# EAGLE board Parallel CS Prototype not linked to schematic (EAGLE 7.2.0)
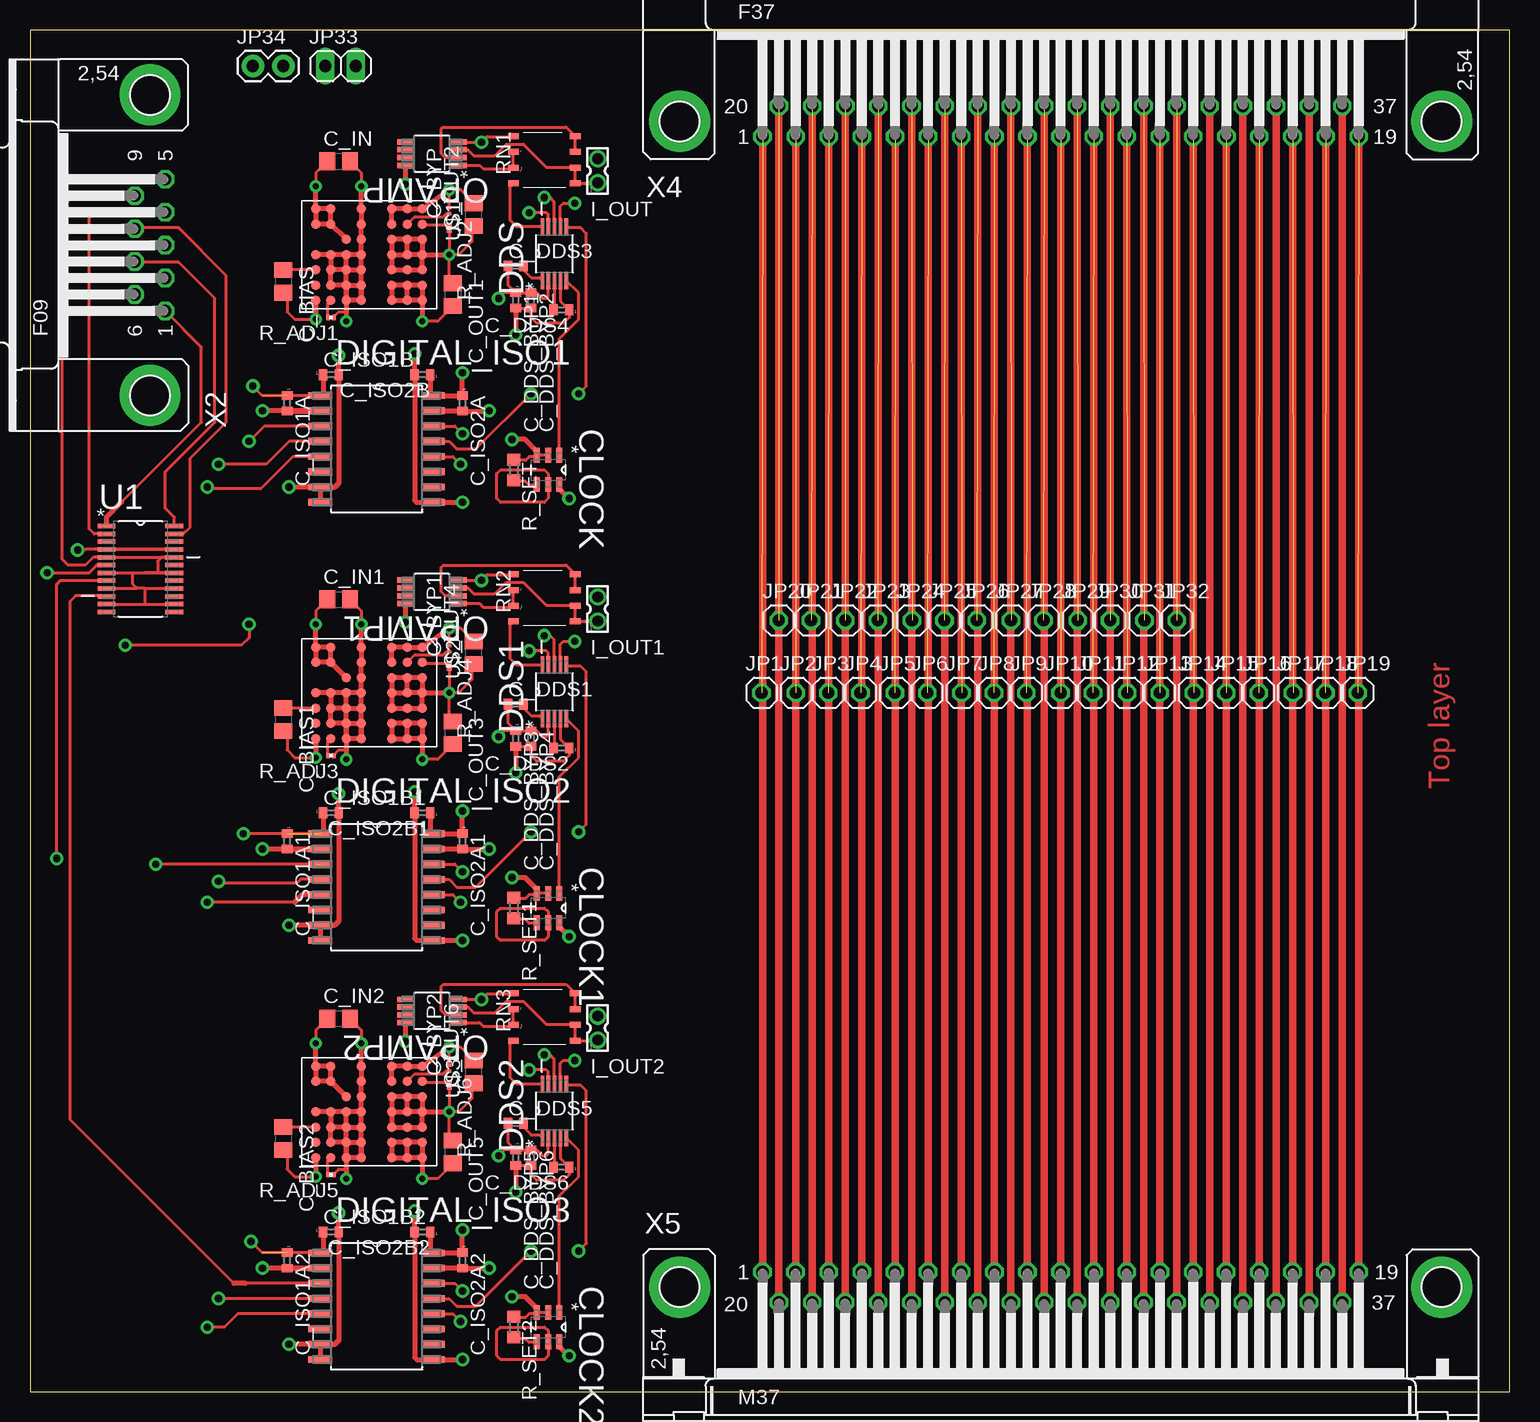
[diagram p0: board, top side]
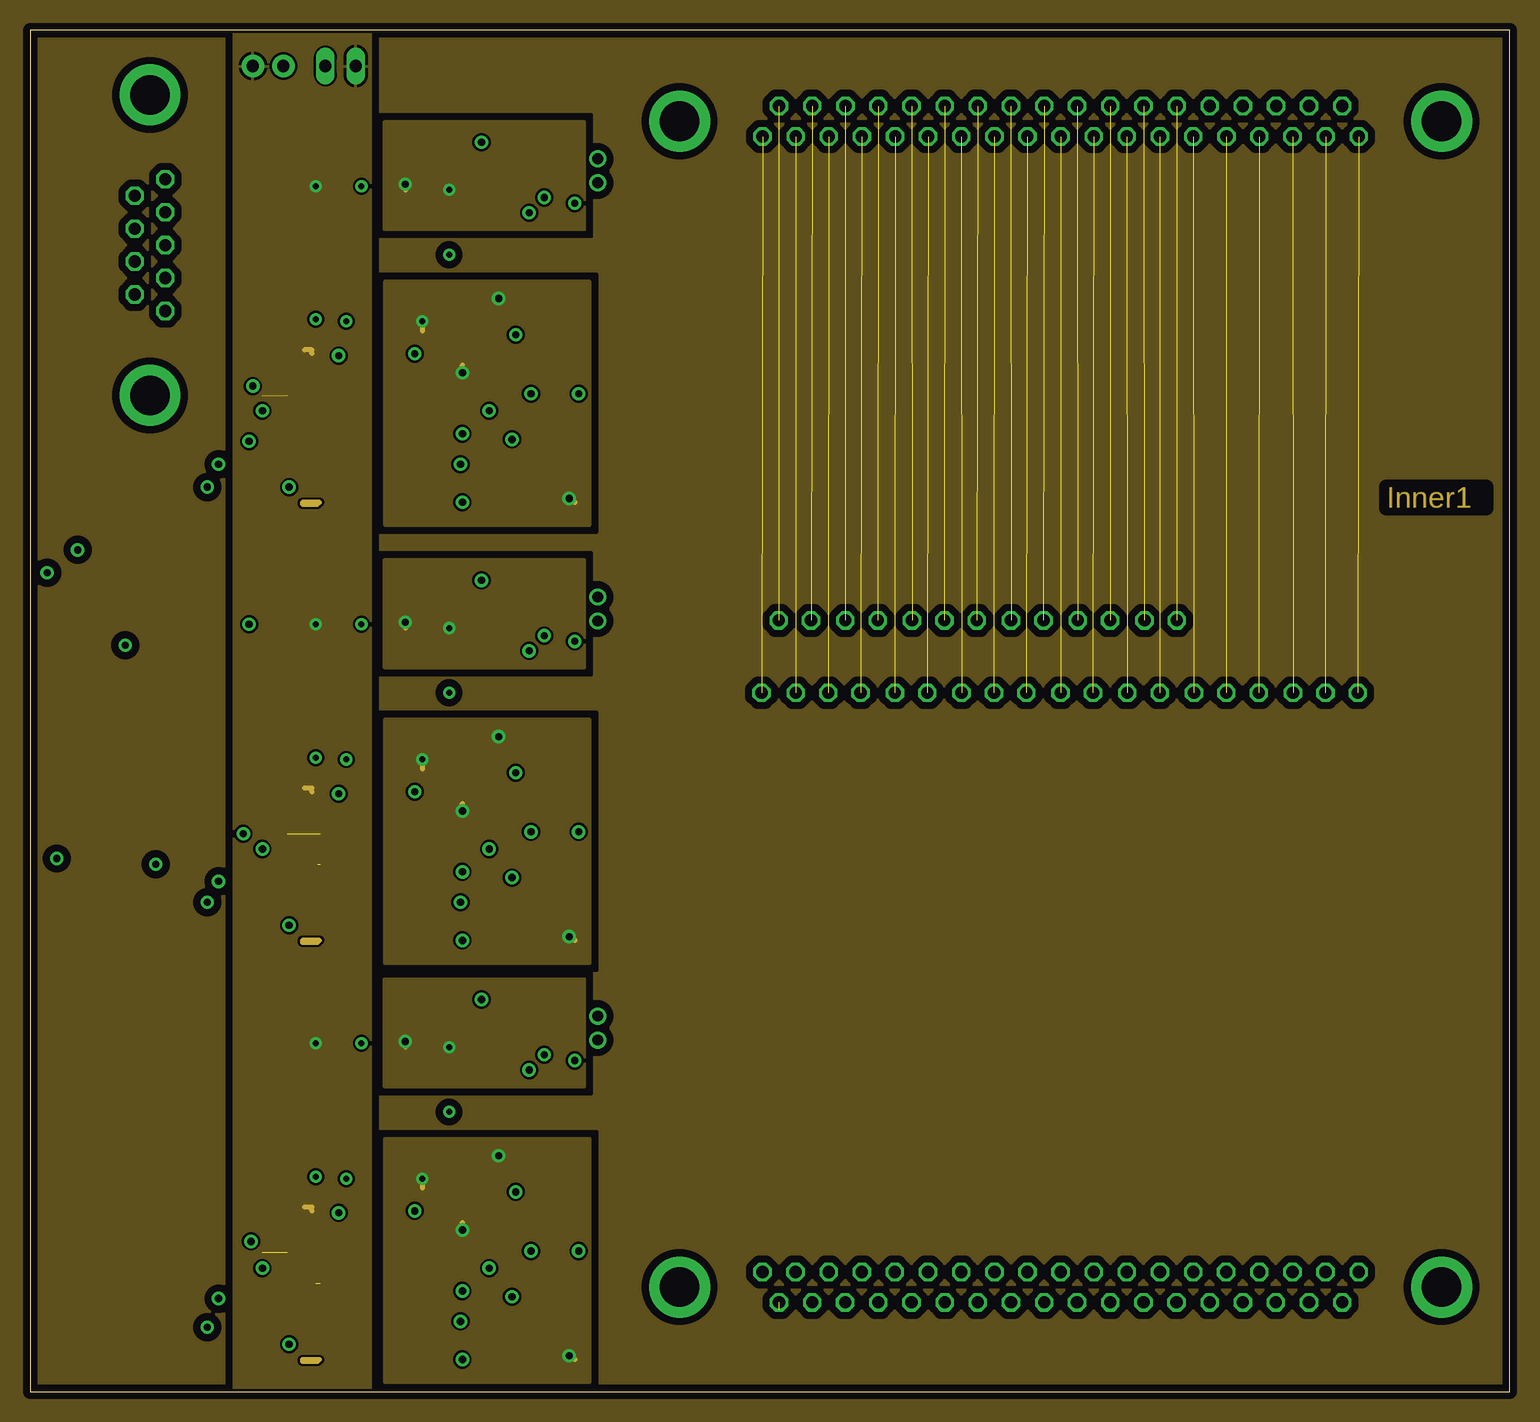
[diagram p1: board, inner layer VDD]
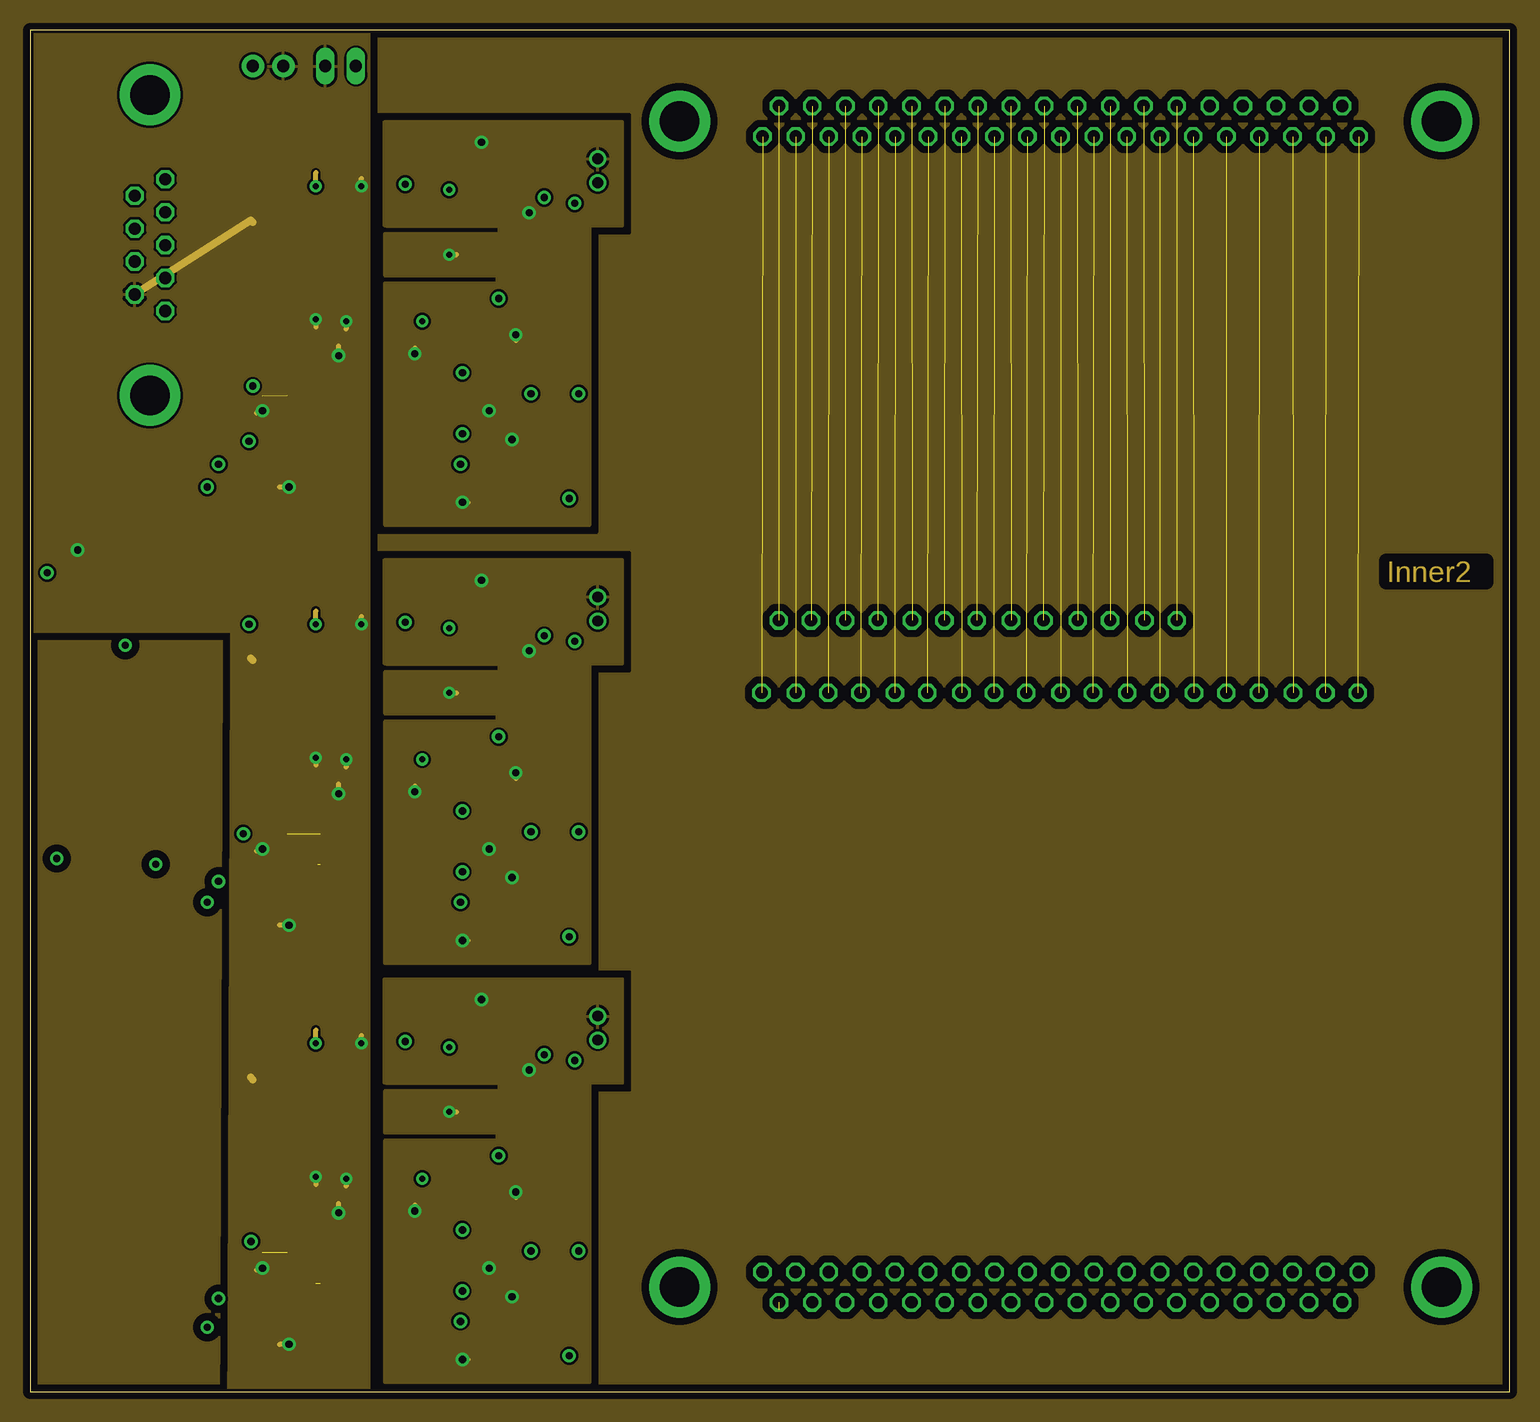
[diagram p2: board, inner layer GND]
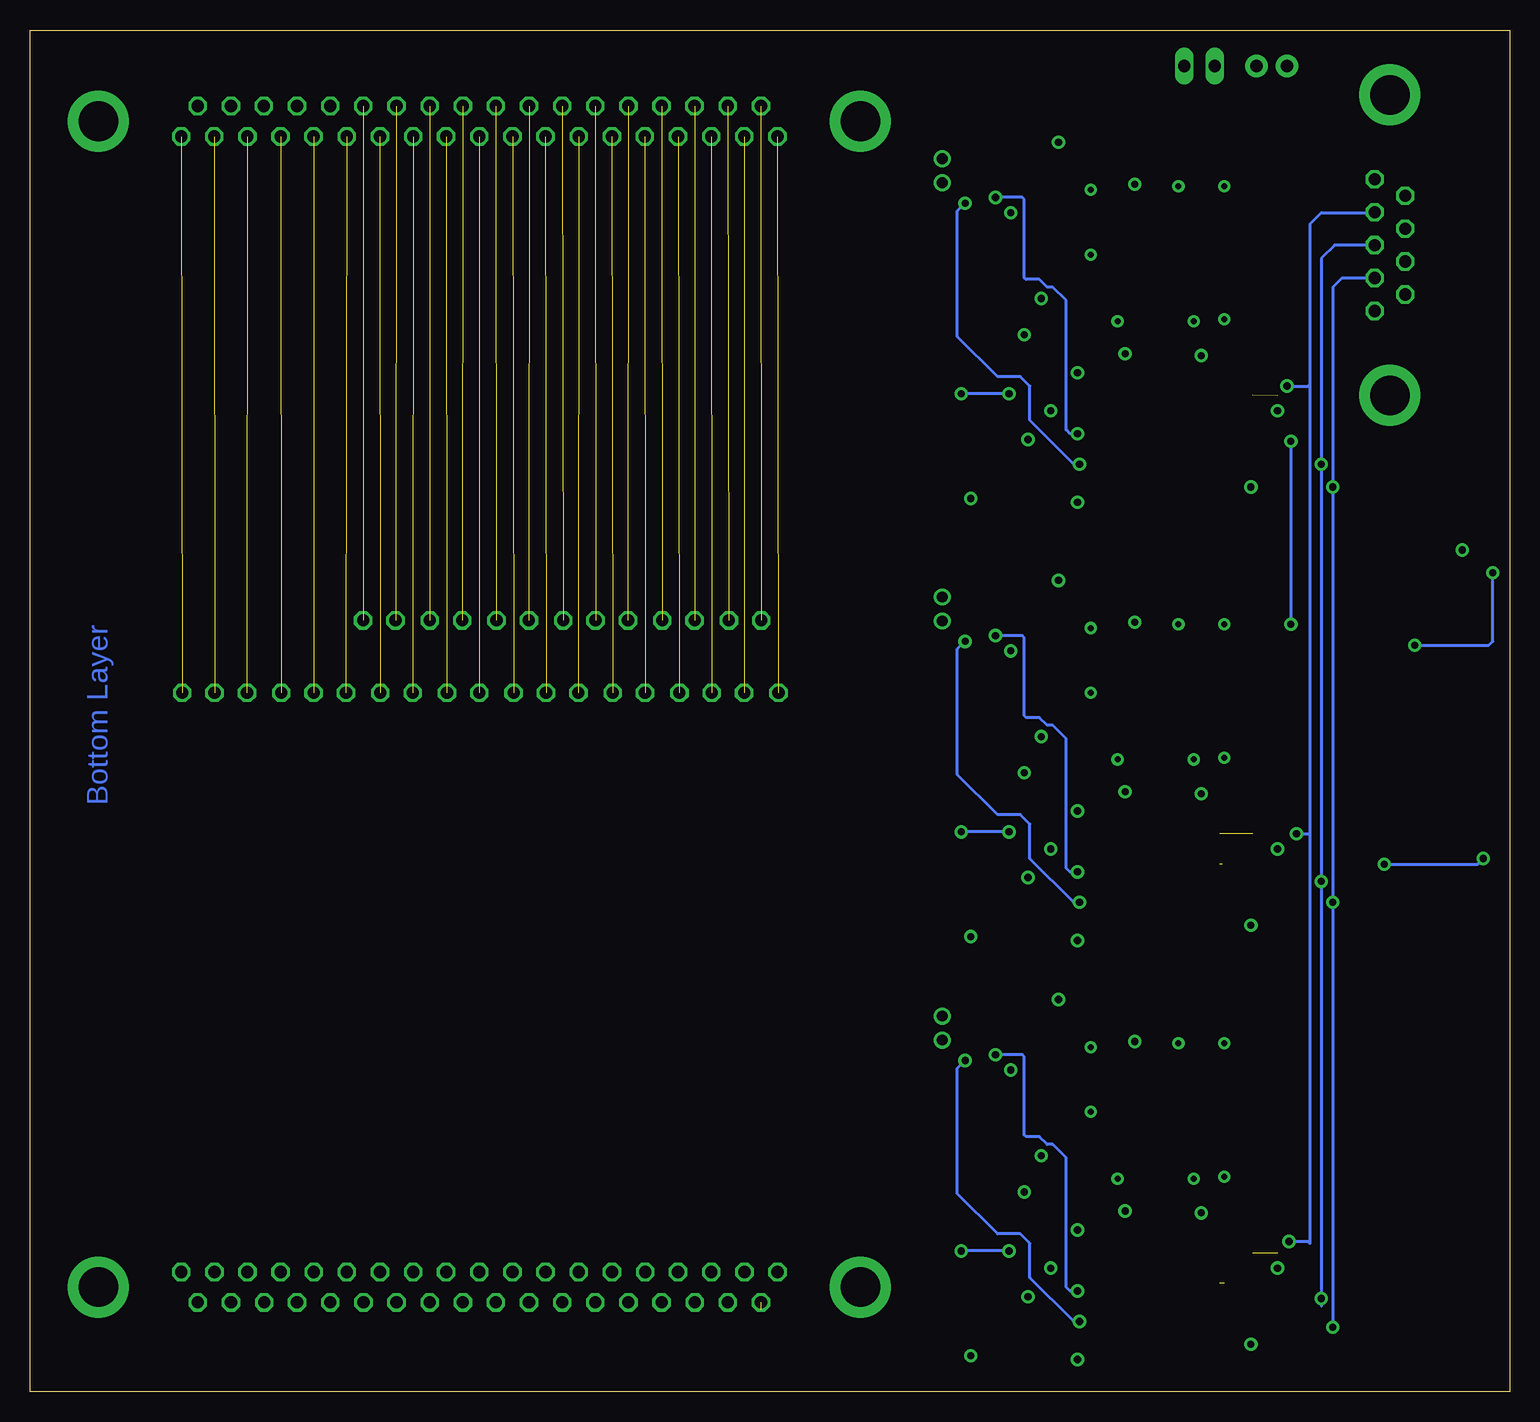
[diagram p3: board, bottom side, seen from below]

Size 123.33 x 113.49 mm. Coordinates in mm from the lower left corner, seen from the top.
Outline: 0,0 123.33,0 123.33,113.49 0,113.49 0,0
Copper layers (1*2*15*16): Top 0.035mm / dielectric 1.5mm / VDD 0.035mm / dielectric 0.15mm / GND 0.035mm / dielectric 0.2mm / Bottom 0.035mm
Design rules "pcbtrain *": minimum track width 0.2mm, minimum drill 0.4mm, track to track 0.2mm, track to pad 0.2mm, pad to pad 0.2mm, via to via 0.2mm, smd to smd 0mil, copper to edge 10mil, drill to drill 0.2mm, minimum pad ring 10mil, minimum via ring 10mil, stop-mask expansion 0.125mm, vias tented up to drill 0mil, thermal gap 10mil

## Footprints (pad centres in the part's own frame; a part is rotated, then mirrored left to right if it is on the bottom)
C0805 = smd 1.3 x 1.5: 1 -0.95,0; 2 0.95,0
C0201 = smd 0.25 x 0.35: 1 -0.25,0; 2 0.25,0
C0402 = smd 0.7 x 0.9: 1 -0.65,0; 2 0.65,0
SOT95P280X100-6N = smd 1.219 x 0.508: 1 -1.219,0.94; 2 -1.219,0; 3 -1.219,-0.94; 4 1.219,-0.94; 5 1.219,0; 6 1.219,0.94
SOP50P490X110-10N = smd 1.422 x 0.305: 1 -2.235,0.991; 2 -2.235,0.508; 3 -2.235,0; 4 -2.235,-0.508; 5 -2.235,-0.991; 6 2.235,-0.991; 7 2.235,-0.508; 8 2.235,0; 9 2.235,0.508; 10 2.235,0.991
SOIC127P1032X265-16N = smd 1.981 x 0.559: 1 -4.699,4.445; 2 -4.699,3.175; 3 -4.699,1.905; 4 -4.699,0.635; 5 -4.699,-0.635; 6 -4.699,-1.905; 7 -4.699,-3.175; 8 -4.699,-4.445; 9 4.699,-4.445; 10 4.699,-3.175; 11 4.699,-1.905; 12 4.699,-0.635; 13 4.699,0.635; 14 4.699,1.905; 15 4.699,3.175; 16 4.699,4.445
332-02 = drill 0.9 pad 1.27: 1 0,-1; 2 0,1
1X01 = drill 1.016 octagon: 1 0,0
1X02 = drill 1.016 long: 1 -1.27,0; 2 1.27,0
1X02' = drill 1.016 pad 1.88: 1 0,0; 2 2.54,0
SOP65P490X109-8N = smd 1.372 x 0.457: 1 -2.21,0.965; 2 -2.21,0.33; 3 -2.21,-0.33; 4 -2.21,-0.965; 5 2.21,-0.965; 6 2.21,-0.33; 7 2.21,0.33; 8 2.21,0.965
R0201 = smd 0.28 x 0.43: 1 -0.255,0; 2 0.255,0
R0603 = smd 1 x 1.1: 1 -0.85,0; 2 0.85,0
CTS742C083 = smd 0.5 x 0.9: 1 -2.47,-3.848; 2 -1.162,-3.848; 3 0.146,-3.848; 4 1.454,-3.848; 5 1.454,1.308; 6 0.146,1.308; 7 -1.162,1.308; 8 -2.47,1.308
SOP65P640X120-24N = smd 1.473 x 0.356: 1 -2.819,3.581; 2 -2.819,2.921; 3 -2.819,2.286; 4 -2.819,1.626; 5 -2.819,0.965; 6 -2.819,0.33; 7 -2.819,-0.33; 8 -2.819,-0.965; 9 -2.819,-1.626; 10 -2.819,-2.286; 11 -2.819,-2.921; 12 -2.819,-3.581; 13 2.819,-3.581; 14 2.819,-2.921; 15 2.819,-2.286; 16 2.819,-1.626; 17 2.819,-0.965; 18 2.819,-0.33; 19 2.819,0.33; 20 2.819,0.965; 21 2.819,1.626; 22 2.819,2.286; 23 2.819,2.921; 24 2.819,3.581
BGA-49 = smd 0.78 x 0.78: ADJ1 3.81,-3.175; ADJ2 -2.54,4.445; BIAS 1.27,-4.445; BYP -2.54,3.175; GND@1 -3.81,-0.635; GND@2 -2.54,-0.635; GND@3 -1.27,-0.635; GND@4 0,-0.635; GND@5 1.27,-0.635; GND@6 2.54,-0.635; GND@7 3.81,-0.635; GND@8 0,-1.905; GND@9 1.27,-1.905; GND@10 2.54,-1.905; GND@11 3.81,-1.905; GND@12 0,-3.175; GND@13 1.27,-3.175; GND@14 2.54,-3.175; GND@15 0,-4.445; GND@16 3.81,-4.445; RUN -1.27,-1.905; SS 2.54,-4.445; VIN@1 -3.81,-3.175; VIN@2 -2.54,-3.175; VIN@3 -3.81,-4.445; VIN@4 -2.54,-4.445; VOUT1@1 2.54,4.445; VOUT1@2 2.54,3.175; VOUT1@3 2.54,1.905; VOUT1@4 3.81,4.445; VOUT1@5 3.81,3.175; VOUT1@6 3.81,1.905; VOUT2@1 -3.81,4.445; VOUT2@2 -3.81,3.175; VOUT2@3 -3.81,1.905; VOUT2@4 -2.54,1.905; VOUT-@1 -1.27,4.445; VOUT-@2 -1.27,3.175; VOUT-@3 -1.27,1.905; VOUT-@4 0,4.445; VOUT-@5 0,3.175; VOUT-@6 0,1.905; VOUT-@7 1.27,4.445; VOUT-@8 1.27,3.175; VOUT-@9 1.27,1.905
F09HP = drill 1.016 octagon: 1 -5.486,-1.27; 2 -2.743,-1.27; 3 0,-1.27; 4 2.743,-1.27; 5 5.486,-1.27; 6 -4.115,1.27; 7 -1.372,1.27; 8 1.372,1.27; 9 4.115,1.27 | drill 3.302 pad 5.08: G1 -12.522,0; G2 12.522,0
F37HP = drill 1.016 octagon: 1 -24.841,-1.27; 2 -22.073,-1.27; 3 -19.329,-1.27; 4 -16.561,-1.27; 5 -13.792,-1.27; 6 -11.049,-1.27; 7 -8.28,-1.27; 8 -5.512,-1.27; 9 -2.769,-1.27; 10 0,-1.27; 11 2.769,-1.27; 12 5.512,-1.27; 13 8.28,-1.27; 14 11.049,-1.27; 15 13.818,-1.27; 16 16.561,-1.27; 17 19.329,-1.27; 18 22.098,-1.27; 19 24.841,-1.27; 20 -23.47,1.27; 21 -20.701,1.27; 22 -17.932,1.27; 23 -15.189,1.27; 24 -12.421,1.27; 25 -9.652,1.27; 26 -6.909,1.27; 27 -4.14,1.27; 28 -1.372,1.27; 29 1.372,1.27; 30 4.14,1.27; 31 6.909,1.27; 32 9.677,1.27; 33 12.421,1.27; 34 15.189,1.27; 35 17.958,1.27; 36 20.701,1.27; 37 23.47,1.27 | drill 3.302 pad 5.08: G1 -31.75,0; G2 31.75,0
M37HP = drill 1.016 octagon: 1 -24.841,1.27; 2 -22.098,1.27; 3 -19.329,1.27; 4 -16.561,1.27; 5 -13.818,1.27; 6 -11.049,1.27; 7 -8.28,1.27; 8 -5.512,1.27; 9 -2.769,1.27; 10 0,1.27; 11 2.769,1.27; 12 5.512,1.27; 13 8.28,1.27; 14 11.049,1.27; 15 13.792,1.27; 16 16.561,1.27; 17 19.329,1.27; 18 22.073,1.27; 19 24.841,1.27; 20 -23.47,-1.27; 21 -20.701,-1.27; 22 -17.958,-1.27; 23 -15.189,-1.27; 24 -12.421,-1.27; 25 -9.652,-1.27; 26 -6.909,-1.27; 27 -4.14,-1.27; 28 -1.372,-1.27; 29 1.372,-1.27; 30 4.14,-1.27; 31 6.909,-1.27; 32 9.652,-1.27; 33 12.421,-1.27; 34 15.189,-1.27; 35 17.932,-1.27; 36 20.701,-1.27; 37 23.47,-1.27 | drill 3.302 pad 5.08: G1 -31.75,0; G2 31.75,0

## Placement (x,y rotation side)
C_BIAS  4.7u  [C0805]  21.11,92.55 270 top
C_BIAS1  4.7u  [C0805]  21.11,56.04 270 top
C_BIAS2  4.7u  [C0805]  21.11,21.11 270 top
C_BYP  0.01u  [C0201]  34.92,98.42 90 top
C_BYP1  0.01u  [C0201]  34.92,61.91 90 top
C_BYP2  0.01u  [C0201]  34.92,26.99 90 top
C_DDS1  10n  [C0402]  40.48,57.31 0 top
C_DDS2  100n  [C0402]  44.29,53.66 180 top
C_DDS3  10n  [C0402]  40.48,93.82 0 top
C_DDS4  100n  [C0402]  44.29,90.17 180 top
C_DDS5  10n  [C0402]  40.48,22.38 0 top
C_DDS6  100n  [C0402]  44.29,18.73 180 top
C_DDS_BYP1  0.1u  [C0402]  40.48,90.96 270 top
C_DDS_BYP2  10u  [C0402]  41.75,90.96 270 top
C_DDS_BYP3  0.1u  [C0402]  40.48,54.45 270 top
C_DDS_BYP4  10u  [C0402]  41.75,54.45 270 top
C_DDS_BYP5  0.1u  [C0402]  40.48,19.53 270 top
C_DDS_BYP6  10u  [C0402]  41.75,19.53 270 top
C_IN  2.2u  [C0805]  25.72,102.55 0 top
C_IN1  2.2u  [C0805]  25.72,66.04 0 top
C_IN2  2.2u  [C0805]  25.72,31.11 0 top
C_ISO1A  1u  [C0402]  21.43,82.39 270 top
C_ISO1A1  1u  [C0402]  21.43,45.88 270 top
C_ISO1A2  1u  [C0402]  21.43,10.95 270 top
C_ISO1B  0.1u  [C0402]  25.08,84.77 0 top
C_ISO1B1  0.1u  [C0402]  25.08,48.26 0 top
C_ISO1B2  0.1u  [C0402]  25.08,13.34 0 top
C_ISO2A  1u  [C0402]  36.04,82.39 270 top
C_ISO2A1  1u  [C0402]  36.04,45.88 270 top
C_ISO2A2  1u  [C0402]  36.04,10.95 270 top
C_ISO2B  0.1u  [C0402]  32.7,84.77 180 top
C_ISO2B1  0.1u  [C0402]  32.7,48.26 180 top
C_ISO2B2  0.1u  [C0402]  32.7,13.34 180 top
C_OUT1  47u  [C0805]  35.24,91.44 270 top
C_OUT2  10u  [C0805]  36.99,98.11 90 top
C_OUT3  47u  [C0805]  35.24,54.93 270 top
C_OUT4  10u  [C0805]  36.99,61.59 90 top
C_OUT5  47u  [C0805]  35.24,20 270 top
C_OUT6  10u  [C0805]  36.99,26.67 90 top
CLOCK  LTC6906IS6PBF  [SOT95P280X100-6N]  43.18,76.83 270 top
CLOCK1  LTC6906IS6PBF  [SOT95P280X100-6N]  43.18,40.32 270 top
CLOCK2  LTC6906IS6PBF  [SOT95P280X100-6N]  43.18,5.4 270 top
DDS  AD9833BRMZ  [SOP50P490X110-10N]  43.7,94.85 90 top
DDS1  AD9833BRMZ  [SOP50P490X110-10N]  43.7,58.34 90 top
DDS2  AD9833BRMZ  [SOP50P490X110-10N]  43.7,23.42 90 top
DIGITAL_ISO1  ADUM1410ARWZ  [SOIC127P1032X265-16N]  28.89,78.58 0 top
DIGITAL_ISO2  ADUM1410ARWZ  [SOIC127P1032X265-16N]  28.89,42.07 0 top
DIGITAL_ISO3  ADUM1410ARWZ  [SOIC127P1032X265-16N]  28.89,7.14 0 top
I_OUT  332-02  [332-02]  47.31,101.76 0 top
I_OUT1  332-02  [332-02]  47.31,65.25 0 top
I_OUT2  332-02  [332-02]  47.31,30.32 0 top
JP1  [1X01]  60.96,58.26 0 top
JP2  [1X01]  63.82,58.26 0 top
JP3  [1X01]  66.52,58.26 0 top
JP4  [1X01]  69.22,58.26 0 top
JP5  [1X01]  72.07,58.26 0 top
JP6  [1X01]  74.77,58.26 0 top
JP7  [1X01]  77.63,58.26 0 top
JP8  [1X01]  80.33,58.26 0 top
JP9  [1X01]  83.03,58.26 0 top
JP10  [1X01]  85.88,58.26 0 top
JP11  [1X01]  88.58,58.26 0 top
JP12  [1X01]  91.44,58.26 0 top
JP13  [1X01]  94.14,58.26 0 top
JP14  [1X01]  97,58.26 0 top
JP15  [1X01]  99.69,58.26 0 top
JP16  [1X01]  102.39,58.26 0 top
JP17  [1X01]  105.25,58.26 0 top
JP18  [1X01]  107.95,58.26 0 top
JP19  [1X01]  110.65,58.26 0 top
JP20  [1X01]  62.39,64.29 0 top
JP21  [1X01]  65.09,64.29 0 top
JP22  [1X01]  67.94,64.29 0 top
JP23  [1X01]  70.64,64.29 0 top
JP24  [1X01]  73.5,64.29 0 top
JP25  [1X01]  76.2,64.29 0 top
JP26  [1X01]  78.9,64.29 0 top
JP27  [1X01]  81.76,64.29 0 top
JP28  [1X01]  84.45,64.29 0 top
JP29  [1X01]  87.31,64.29 0 top
JP30  [1X01]  90.01,64.29 0 top
JP31  [1X01]  92.87,64.29 0 top
JP32  [1X01]  95.57,64.29 0 top
JP33  PWR  [1X02]  25.88,110.49 0 top
JP34  [1X02']  18.57,110.49 0 top
OPAMP  LMC6482IMM  [SOP65P490X109-8N]  33.5,103.19 180 top
OPAMP1  LMC6482IMM  [SOP65P490X109-8N]  33.5,66.67 180 top
OPAMP2  LMC6482IMM  [SOP65P490X109-8N]  33.5,31.75 180 top
R_ADJ1  6.8k  [R0201]  25.08,89.53 180 top
R_ADJ2  300k  [R0201]  34.92,97 270 top
R_ADJ3  6.8k  [R0201]  25.08,53.02 180 top
R_ADJ4  300k  [R0201]  34.92,60.48 270 top
R_ADJ5  6.8k  [R0201]  25.08,18.1 180 top
R_ADJ6  300k  [R0201]  34.92,25.56 270 top
R_SET  200k  [R0603]  40.32,76.83 270 top
R_SET1  200k  [R0603]  40.32,40.32 270 top
R_SET2  200k  [R0603]  40.32,5.4 270 top
RN1  CTS742C083  [CTS742C083]  41.59,103.19 90 top
RN2  CTS742C083  [CTS742C083]  41.59,66.67 90 top
RN3  CTS742C083  [CTS742C083]  41.59,31.75 90 top
U1  ADG714BRUZ  [SOP65P640X120-24N]  9.21,68.58 0 top
U$1  LTM8048  [BGA-49]  28.26,94.77 270 top
U$2  LTM8048  [BGA-49]  28.26,58.26 270 top
U$3  LTM8048  [BGA-49]  28.26,23.34 270 top
X2  CTR_ARD  [F09HP]  10,95.57 90 top
X4  DSUB _T  [F37HP]  85.88,105.89 0 top
X5  DSUB_B  [M37HP]  85.88,8.73 0 top

## Library data of the parts
C_BIAS C_BIAS1 C_BIAS2 C_BYP C_BYP1 C_BYP2 C_DDS1-C_DDS6 C_DDS_BYP1-C_DDS_BYP6 C_IN C_IN1 C_IN2 C_ISO1A C_ISO1A1 C_ISO1A2 C_ISO1B C_ISO1B1 C_ISO1B2 C_ISO2A C_ISO2A1 C_ISO2A2 C_ISO2B C_ISO2B1 C_ISO2B2 C_OUT1-C_OUT6 R_ADJ1-R_ADJ6 R_SET R_SET1 R_SET2 = resistor
CLOCK CLOCK1 CLOCK2 = LTC6906; MPN: LTC6906IS6#PBF; OC_FARNELL: 1432109; OC_NEWARK: 10R6975; PACKAGE: TSOT-23-6; SUPPLIER: Linear Technology
DDS DDS1 DDS2 = ad9833; MPN: AD9833BRMZ; OC_FARNELL: 1581966; OC_NEWARK: 19M1014; PACKAGE: MSOP-10; SUPPLIER: Analog Devices
DIGITAL_ISO1-DIGITAL_ISO3 = SwitchBoard; MPN: ADUM1410ARWZ; OC_FARNELL: 2067770; OC_NEWARK: 73T8174; PACKAGE: 16-Lead SOIC_W; SUPPLIER: Analog Devices
I_OUT I_OUT1 I_OUT2 = con-garry
JP1-JP32 JP34 = SwitchBoard
JP33 = pinhead
OPAMP OPAMP1 OPAMP2 = LMC6482; MPN: LMC6482IMM; OC_FARNELL: 1468890; OC_NEWARK: 83F3826; PACKAGE: MSOP-8; SUPPLIER: NationalSemiconductor
RN1-RN3 = resistor-net; OC_FARNELL: unknown; OC_NEWARK: unknown
U1 = SwitchBoard; MPN: ADG714BRUZ; OC_FARNELL: 9604367; OC_NEWARK: 59K1531; PACKAGE: TSSOP-24; SUPPLIER: Analog Devices
U$1-U$3 = LTM8048
X2 X4 X5 = con-subd; OC_FARNELL: unknown; OC_NEWARK: unknown

## Nets
ARD_5V: C_ISO1A1.1 C_ISO1A2.1 C_ISO1A.1 C_ISO1B1.1 C_ISO1B2.1 C_ISO1B.1 DIGITAL_ISO1.1 DIGITAL_ISO2.1 DIGITAL_ISO3.1 U1.2 X2.4
CLK_OUT: CLOCK.1 DDS.5
CLK_OUT1: CLOCK1.1 DDS1.5
CLK_OUT2: CLOCK2.1 DDS2.5
COMP: C_DDS3.2 DDS.1
COMP1: C_DDS1.2 DDS1.1
COMP2: C_DDS5.2 DDS2.1
FSYNC: DDS.8 DIGITAL_ISO1.14
FSYNC1: DDS1.8 DIGITAL_ISO2.14
FSYNC2: DDS2.8 DIGITAL_ISO3.14
FSYNC_ARD: U1.5 U1.7 U1.9 U1.11 U1.14 U1.16 U1.18 U1.20 X2.9
FSYNC_IN: DIGITAL_ISO1.3 U1.6
FSYNC_IN1: DIGITAL_ISO2.3
FSYNC_IN2: DIGITAL_ISO3.3
GND: C_BIAS1.2 C_BIAS2.2 C_BIAS.2 C_IN1.2 C_IN2.2 C_IN.2 C_ISO1A1.2 C_ISO1A2.2 C_ISO1A.2 C_ISO1B1.2 C_ISO1B2.2 C_ISO1B.2 DIGITAL_ISO1.2 DIGITAL_ISO1.7 DIGITAL_ISO1.8 DIGITAL_ISO2.2 DIGITAL_ISO2.7 DIGITAL_ISO2.8 DIGITAL_ISO3.2 DIGITAL_ISO3.7 DIGITAL_ISO3.8 JP33.1 JP34.2 R_ADJ1.1 R_ADJ3.1 R_ADJ5.1 U1.4 U1.21 U$1.GND@1 U$1.GND@2 U$1.GND@3 U$1.GND@4 U$1.GND@5 U$1.GND@6 U$1.GND@7 U$1.GND@8 U$1.GND@9 U$1.GND@10 U$1.GND@11 U$1.GND@12 U$1.GND@13 U$1.GND@14 U$1.GND@15 U$1.GND@16 U$2.GND@1 U$2.GND@2 U$2.GND@3 U$2.GND@4 U$2.GND@5 U$2.GND@6 U$2.GND@7 U$2.GND@8 U$2.GND@9 U$2.GND@10 U$2.GND@11 U$2.GND@12 U$2.GND@13 U$2.GND@14 U$2.GND@15 U$2.GND@16 U$3.GND@1 U$3.GND@2 U$3.GND@3 U$3.GND@4 U$3.GND@5 U$3.GND@6 U$3.GND@7 U$3.GND@8 U$3.GND@9 U$3.GND@10 U$3.GND@11 U$3.GND@12 U$3.GND@13 U$3.GND@14 U$3.GND@15 U$3.GND@16 X2.6
GND_CS: C_DDS4.1 C_DDS_BYP1.2 C_DDS_BYP2.2 C_ISO2A.2 C_ISO2B.2 C_OUT1.1 C_OUT2.1 CLOCK.2 CLOCK.3 DDS.4 DDS.9 DIGITAL_ISO1.9 DIGITAL_ISO1.15 I_OUT.2 OPAMP.4 R_ADJ2.2 R_SET.1 RN1.5 U$1.VOUT-@1 U$1.VOUT-@2 U$1.VOUT-@3 U$1.VOUT-@4 U$1.VOUT-@5 U$1.VOUT-@6 U$1.VOUT-@7 U$1.VOUT-@8 U$1.VOUT-@9
GND_CS1: C_DDS2.1 C_DDS_BYP3.2 C_DDS_BYP4.2 C_ISO2A1.2 C_ISO2B1.2 C_OUT3.1 C_OUT4.1 CLOCK1.2 CLOCK1.3 DDS1.4 DDS1.9 DIGITAL_ISO2.9 DIGITAL_ISO2.15 I_OUT1.2 OPAMP1.4 R_ADJ4.2 R_SET1.1 RN2.5 U$2.VOUT-@1 U$2.VOUT-@2 U$2.VOUT-@3 U$2.VOUT-@4 U$2.VOUT-@5 U$2.VOUT-@6 U$2.VOUT-@7 U$2.VOUT-@8 U$2.VOUT-@9
GND_CS2: C_DDS6.1 C_DDS_BYP5.2 C_DDS_BYP6.2 C_ISO2A2.2 C_ISO2B2.2 C_OUT5.1 C_OUT6.1 CLOCK2.2 CLOCK2.3 DDS2.4 DDS2.9 DIGITAL_ISO3.9 DIGITAL_ISO3.15 I_OUT2.2 OPAMP2.4 R_ADJ6.2 R_SET2.1 RN3.5 U$3.VOUT-@1 U$3.VOUT-@2 U$3.VOUT-@3 U$3.VOUT-@4 U$3.VOUT-@5 U$3.VOUT-@6 U$3.VOUT-@7 U$3.VOUT-@8 U$3.VOUT-@9
IOUT: I_OUT.1 OPAMP.3 RN1.1 RN1.2
IOUT1: I_OUT1.1 OPAMP1.3 RN2.1 RN2.2
IOUT2: I_OUT2.1 OPAMP2.3 RN3.1 RN3.2
N$1: C_DDS4.2 DDS.3
N$2: C_BYP.1 U$1.BYP
N$3: OPAMP.2 RN1.3 RN1.4
N$6: C_BIAS1.1 U$2.BIAS
N$7: OPAMP.1 RN1.6 RN1.7
N$8: CLOCK.4 R_SET.2
N$9: R_ADJ3.2 U$2.ADJ1
N$10: C_BIAS.1 U$1.BIAS
N$11: R_ADJ1.2 U$1.ADJ1
N$12: R_ADJ4.1 U$2.ADJ2
N$13: R_ADJ2.1 U$1.ADJ2
N$14: C_BYP1.1 U$2.BYP
N$15: C_DDS2.2 DDS1.3
N$16: OPAMP1.2 RN2.3 RN2.4
N$17: OPAMP1.1 RN2.6 RN2.7
N$18: CLOCK1.4 R_SET1.2
N$21: C_BIAS2.1 U$3.BIAS
N$22: R_ADJ5.2 U$3.ADJ1
N$23: R_ADJ6.1 U$3.ADJ2
N$24: C_BYP2.1 U$3.BYP
N$25: C_DDS6.2 DDS2.3
N$26: OPAMP2.2 RN3.3 RN3.4
N$27: OPAMP2.1 RN3.6 RN3.7
N$28: CLOCK2.4 R_SET2.2
OUT_1: JP1.1 X4.1 X5.1
OUT_2: JP2.1 X4.2 X5.2
OUT_3: JP3.1 X4.3 X5.3
OUT_4: JP4.1 X4.4 X5.4
OUT_5: JP5.1 X4.5 X5.5
OUT_6: JP6.1 X4.6 X5.6
OUT_7: JP7.1 X4.7 X5.7
OUT_8: JP8.1 X4.8 X5.8
OUT_9: JP9.1 X4.9 X5.9
OUT_10: JP10.1 X4.10 X5.10
OUT_11: JP11.1 X4.11 X5.11
OUT_12: JP12.1 X4.12 X5.12
OUT_13: JP13.1 X4.13 X5.13
OUT_14: JP14.1 X4.14 X5.14
OUT_15: JP15.1 X4.15 X5.15
OUT_16: JP16.1 X4.16 X5.16
OUT_17: JP17.1 X4.17 X5.17
OUT_18: JP18.1 X4.18 X5.18
OUT_19: JP19.1 X4.19 X5.19
OUT_20: JP20.1 X4.20 X5.20
OUT_21: JP21.1 X4.21 X5.21
OUT_22: JP22.1 X4.22 X5.22
OUT_23: JP23.1 X4.23 X5.23
OUT_24: JP24.1 X4.24 X5.24
OUT_25: JP25.1 X4.25 X5.25
OUT_26: JP26.1 X4.26 X5.26
OUT_27: JP27.1 X4.27 X5.27
OUT_28: JP28.1 X4.28 X5.28
OUT_29: JP29.1 X4.29 X5.29
OUT_30: JP30.1 X4.30 X5.30
OUT_31: JP31.1 X4.31 X5.31
OUT_32: JP32.1 X4.32 X5.32
OUT_33: X4.33 X5.33
OUT_34: X4.34 X5.34
OUT_35: X4.35 X5.35
OUT_36: X4.36 X5.36
OUT_37: X4.37 X5.37
SCLK: DDS.7 DIGITAL_ISO1.12
SCLK1: DDS1.7 DIGITAL_ISO2.12
SCLK2: DDS2.7 DIGITAL_ISO3.12
SCLK_IN: DIGITAL_ISO1.5 X2.2
SCLK_IN1: DIGITAL_ISO2.5
SCLK_IN2: DIGITAL_ISO3.5
SDATA: DDS.6 DIGITAL_ISO1.13
SDATA1: DDS1.6 DIGITAL_ISO2.13
SDATA2: DDS2.6 DIGITAL_ISO3.13
SDATA_IN: DIGITAL_ISO1.4 X2.3
SDATA_IN1: DIGITAL_ISO2.4
SDATA_IN2: DIGITAL_ISO3.4
SW_SCLK: U1.1 X2.1
SW_~RESET: U1.23 X2.8
SW_~SYNC: U1.24 X2.7
V_SINE: DDS.10 RN1.8
V_SINE1: DDS1.10 RN2.8
V_SINE2: DDS2.10 RN3.8
VDD: C_IN1.1 C_IN2.1 C_IN.1 JP33.2 JP34.1 U$1.RUN U$1.VIN@1 U$1.VIN@2 U$1.VIN@3 U$1.VIN@4 U$2.RUN U$2.VIN@1 U$2.VIN@2 U$2.VIN@3 U$2.VIN@4 U$3.RUN U$3.VIN@1 U$3.VIN@2 U$3.VIN@3 U$3.VIN@4
VDD_CS_ANA: C_BYP.2 C_OUT2.2 OPAMP.8 U$1.VOUT2@1 U$1.VOUT2@2 U$1.VOUT2@3 U$1.VOUT2@4
VDD_CS_ANA1: C_BYP1.2 C_OUT4.2 OPAMP1.8 U$2.VOUT2@1 U$2.VOUT2@2 U$2.VOUT2@3 U$2.VOUT2@4
VDD_CS_ANA2: C_BYP2.2 C_OUT6.2 OPAMP2.8 U$3.VOUT2@1 U$3.VOUT2@2 U$3.VOUT2@3 U$3.VOUT2@4
VDD_CS_DIG: C_DDS3.1 C_DDS_BYP1.1 C_DDS_BYP2.1 C_ISO2A.1 C_ISO2B.1 C_OUT1.2 CLOCK.6 DDS.2 DIGITAL_ISO1.16 U$1.VOUT1@1 U$1.VOUT1@2 U$1.VOUT1@3 U$1.VOUT1@4 U$1.VOUT1@5 U$1.VOUT1@6
VDD_CS_DIG1: C_DDS1.1 C_DDS_BYP3.1 C_DDS_BYP4.1 C_ISO2A1.1 C_ISO2B1.1 C_OUT3.2 CLOCK1.6 DDS1.2 DIGITAL_ISO2.16 U$2.VOUT1@1 U$2.VOUT1@2 U$2.VOUT1@3 U$2.VOUT1@4 U$2.VOUT1@5 U$2.VOUT1@6
VDD_CS_DIG2: C_DDS5.1 C_DDS_BYP5.1 C_DDS_BYP6.1 C_ISO2A2.1 C_ISO2B2.1 C_OUT5.2 CLOCK2.6 DDS2.2 DIGITAL_ISO3.16 U$3.VOUT1@1 U$3.VOUT1@2 U$3.VOUT1@3 U$3.VOUT1@4 U$3.VOUT1@5 U$3.VOUT1@6

## Tracks (layer width: path | path; a pad name or v marks a point on that pad's centre or on a via)
ARD_5V  (via drill 0.6)  (3 unrouted)
  Top 0.254: DIGITAL_ISO1.1 19.37,83.03 v18.57,83.82 | U1.2 5.33,71.5 4.92,71.91 4.92,97.79 5.4,98.27 11.23,98.27 X2.4 | DIGITAL_ISO2.1 v17.78,46.51 | DIGITAL_ISO3.1 19.37,11.59 v18.41,12.54
  Top 0.406: C_ISO1B.1 24.43,83.27 DIGITAL_ISO1.1 | C_ISO1B1.1 24.43,46.75 DIGITAL_ISO2.1 | C_ISO1B2.1 24.43,11.83 DIGITAL_ISO3.1
  Bottom 0.254: 16.67,83.98 16.67,97.31 15.72,98.27 11.32,98.27 X2.4 | 16.67,83.98 16.67,46.51 | 16.67,46.51 16.67,12.38 16.83,12.54 v18.41,12.54 | v17.78,46.51 16.67,46.51 | v18.57,83.82 16.83,83.82 16.67,83.98
CLK_OUT
  Top 0.254: 44.77,92.54 DDS.5 45.72,91.58 45.72,89.38 44.12,87.78 CLOCK.1
CLK_OUT1
  Top 0.254: 44.77,56.03 DDS1.5 45.72,55.07 45.72,52.86 44.12,51.26 CLOCK1.1
CLK_OUT2
  Top 0.254: 44.77,21.1 DDS2.5 45.72,20.15 45.72,17.94 44.12,16.34 CLOCK2.1
COMP
  Top 0.254: C_DDS3.2 41.13,93.49 41.75,92.87 42.45,92.87 DDS.1
COMP1
  Top 0.254: C_DDS1.2 41.13,56.98 41.75,56.36 42.45,56.36 DDS1.1
COMP2
  Top 0.254: C_DDS5.2 41.13,22.05 41.75,21.43 42.45,21.43 DDS2.1
FSYNC  (via drill 0.6)
  Top 0.254: DIGITAL_ISO1.14 35.4,80.49 v36.04,79.85 | v42.86,99.54 43.34,99.54 43.66,99.22 43.66,97.13 DDS.8
  Bottom 0.254: v36.04,79.85 36.67,79.85 36.99,80.17 36.99,90.96 38.1,92.08 38.58,92.08 39.21,92.71 40.32,92.71 40.48,92.87 40.48,99.38 40.64,99.54 v42.86,99.54
FSYNC1  (via drill 0.6)
  Top 0.254: DIGITAL_ISO2.14 35.4,43.97 v36.04,43.34 | v42.86,63.02 43.34,63.02 43.66,62.71 43.66,60.62 DDS1.8
  Bottom 0.254: v36.04,43.34 36.67,43.34 36.99,43.66 36.99,54.45 38.1,55.56 38.58,55.56 39.21,56.2 40.32,56.2 40.48,56.36 40.48,62.87 40.64,63.02 v42.86,63.02
FSYNC2  (via drill 0.6)
  Top 0.254: DIGITAL_ISO3.14 35.4,9.05 v36.04,8.41 | v42.86,28.1 43.34,28.1 43.66,27.78 43.66,25.69 DDS2.8
  Bottom 0.254: v36.04,8.41 36.67,8.41 36.99,8.73 36.99,19.53 38.1,20.64 38.58,20.64 39.21,21.27 40.32,21.27 40.48,21.43 40.48,27.94 40.64,28.1 v42.86,28.1
FSYNC_ARD
  Top 0.254: 8.57,68.25 10.64,68.25 | 10.64,68.25 U1.18 9.54,68.25 9.53,68.26 | U1.9 8.93,66.95 | 9.53,66.95 U1.16 | U1.11 9.59,65.66 | 9.59,65.66 U1.14 | U1.7 8.57,68.25 | 10.64,68.25 10.64,69.22 10.97,69.55 U1.20 U1.5 5.25,69.55 4.6,68.9 3.17,68.9 2.7,69.37 2.7,98.74 3.65,99.69 8.72,99.69 X2.9 | 9.59,65.66 9.59,66.89 9.53,66.95 | 9.53,66.95 8.93,66.95 | 8.93,66.95 8.57,67.31 8.57,68.25
FSYNC_IN  (via drill 0.6)
  Top 0.254: DIGITAL_ISO1.3 19.53,80.49 v18.26,79.22 | v18.26,63.98 18.26,62.87 17.62,62.23 v7.94,62.23 | v1.43,68.26 4.92,68.26 5.56,68.9 6.38,68.9 U1.6
  Bottom 0.254: v18.26,79.22 v18.26,63.98 | v7.94,62.23 1.75,62.23 1.43,62.55 v1.43,68.26
FSYNC_IN1  (via drill 0.6)  (1 unrouted)
  Top 0.254: 23.97,43.97 v10.48,43.97 | v2.22,44.45 2.22,67.31 2.54,67.63 6.51,67.63
  Bottom 0.254: v10.48,43.97 2.7,43.97 v2.22,44.45
FSYNC_IN2  (1 unrouted)
  Top 0.254: 23.81,9.05 17.94,9.05 | 6.51,66.36 3.81,66.36 3.33,65.88 3.33,22.7 16.99,9.05
  Top 0.406: 17.94,9.05 16.99,9.05
GND  (via drill 0.5, 0.6)
  Top 0.254: C_BIAS.2 21.43,91.28 21.43,90.01 22.07,89.38 v23.81,89.38 | C_IN.2 27.62,101.6 v27.62,100.49 | R_ADJ1.1 25.34,89.63 25.72,90.01 26.35,90.01 | U1.4 U1.21 4.64,70.21 v3.97,70.17 | C_BIAS1.2 21.43,54.77 21.43,53.5 22.07,52.86 v23.81,52.86 | C_IN1.2 27.62,65.08 v27.62,63.98 | R_ADJ3.1 25.34,53.12 25.72,53.5 26.35,53.5 | C_BIAS2.2 21.43,19.85 21.43,18.57 22.07,17.94 v23.81,17.94 | C_IN2.2 27.62,30.16 v27.62,29.05 | R_ADJ5.1 25.34,18.19 25.72,18.57 26.35,18.57
  Top 0.406: U$1.GND@7 U$1.GND@11 U$1.GND@10 | U$1.GND@10 U$1.GND@6 U$1.GND@7 | U$1.GND@7 U$1.GND@5 | U$1.GND@5 U$1.GND@4 | U$1.GND@4 U$1.GND@8 | U$1.GND@8 U$1.GND@12 | U$1.GND@12 U$1.GND@15 | U$1.GND@12 U$1.GND@13 | U$1.GND@10 U$1.GND@14 U$1.GND@13 | U$1.GND@10 U$1.GND@9 | U$1.GND@9 U$1.GND@8 | U$1.GND@9 U$1.GND@13 | U$1.GND@10 26.35,90.01 v26.35,89.22 | U$1.GND@16 v23.81,89.38 | U$1.GND@4 U$1.GND@3 U$1.GND@2 U$1.GND@1 v27.62,100.49 | C_ISO1A.2 24.18,81.74 DIGITAL_ISO1.2 v19.37,81.76 | DIGITAL_ISO1.7 25.4,75.41 25.73,75.74 C_ISO1B.2 v25.72,86.36 | DIGITAL_ISO1.7 v21.59,75.41 | DIGITAL_ISO1.7 DIGITAL_ISO1.8 | U$1.GND@9 U$1.GND@5 | U$2.GND@7 U$2.GND@11 U$2.GND@10 | U$2.GND@10 U$2.GND@6 U$2.GND@7 | U$2.GND@7 U$2.GND@5 | U$2.GND@5 U$2.GND@4 | U$2.GND@4 U$2.GND@8 | U$2.GND@8 U$2.GND@12 | U$2.GND@12 U$2.GND@15 | U$2.GND@12 U$2.GND@13 | U$2.GND@10 U$2.GND@14 U$2.GND@13 | U$2.GND@10 U$2.GND@9 | U$2.GND@9 U$2.GND@8 | U$2.GND@9 U$2.GND@13 | U$2.GND@10 26.35,53.5 v26.35,52.7 | U$2.GND@16 v23.81,52.86 | U$2.GND@4 U$2.GND@3 U$2.GND@2 U$2.GND@1 v27.62,63.98 | C_ISO1A1.2 24.18,45.23 DIGITAL_ISO2.2 v19.37,45.24 | DIGITAL_ISO2.7 25.4,38.89 25.73,39.23 C_ISO1B1.2 v25.72,49.85 | DIGITAL_ISO2.7 v21.59,38.89 | DIGITAL_ISO2.7 DIGITAL_ISO2.8 | U$2.GND@9 U$2.GND@5 | U$3.GND@7 U$3.GND@11 U$3.GND@10 | U$3.GND@10 U$3.GND@6 U$3.GND@7 | U$3.GND@7 U$3.GND@5 | U$3.GND@5 U$3.GND@4 | U$3.GND@4 U$3.GND@8 | U$3.GND@8 U$3.GND@12 | U$3.GND@12 U$3.GND@15 | U$3.GND@12 U$3.GND@13 | U$3.GND@10 U$3.GND@14 U$3.GND@13 | U$3.GND@10 U$3.GND@9 | U$3.GND@9 U$3.GND@8 | U$3.GND@9 U$3.GND@13 | U$3.GND@10 26.35,18.57 v26.35,17.78 | U$3.GND@16 v23.81,17.94 | U$3.GND@4 U$3.GND@3 U$3.GND@2 U$3.GND@1 v27.62,29.05
  Top 0.406: C_ISO1A2.2 24.18,10.3 DIGITAL_ISO3.2 v19.37,10.32 | DIGITAL_ISO3.7 25.4,3.97 25.73,4.3 C_ISO1B2.2 v25.72,14.92 | DIGITAL_ISO3.7 v21.59,3.97 | DIGITAL_ISO3.7 DIGITAL_ISO3.8 | U$3.GND@9 U$3.GND@5
  GND 0.406: v26.35,89.22 26.35,88.58 | v23.81,89.38 23.81,88.74 | v27.62,100.49 27.62,101.12 | v25.72,86.36 25.72,87.15 | v21.59,75.41 20.8,75.41 | v19.37,81.76 19.05,81.76 18.89,81.6 | v26.35,52.7 26.35,52.07 | v23.81,52.86 23.81,52.23 | v27.62,63.98 27.62,64.61 | v25.72,49.85 25.72,50.64 | v21.59,38.89 20.8,38.89 | v19.37,45.24 19.05,45.24 18.89,45.09 | v26.35,17.78 26.35,17.14 | v23.81,17.94 23.81,17.3 | v27.62,29.05 27.62,29.69 | v25.72,14.92 25.72,15.72 | v21.59,3.97 20.8,3.97 | v19.37,10.32 19.05,10.32 18.89,10.16
  GND 0.61: X2.6 18.4,97.64 18.57,97.47 | 18.4,61.13 18.57,60.96 | 18.4,26.21 18.57,26.04
  pour GND: 28.26,113.98 16.99,113.98 16.51,-3.65 28.26,-3.65
  pour GND: 19.53,63.34 -6.99,63.34 -6.99,64.14 -6.03,64.14 -6.03,115.09 19.84,115.09 19.84,114.3 19.53,114.3
GND_CS  (via drill 0.5, 0.6)
  Top 0.254: R_ADJ2.2 v34.92,94.77 | C_OUT1.1 34.92,92.71 v34.92,94.77 | C_OUT2.1 36.83,97 36.83,95.89 35.72,94.77 v34.92,94.77 | C_DDS_BYP1.2 C_DDS_BYP2.2 41.75,89.53 42.23,89.06 44.45,89.06 44.94,89.55 C_DDS4.1 44.2,90.91 DDS.4 | R_SET.1 40.38,77.63 41.27,77.63 41.59,77.95 42.13,77.95 CLOCK.3 CLOCK.2 | OPAMP.4 37.64,104.15 | RN1.5 40.26,104.62 38.1,104.62 37.64,104.15 | 37.64,104.15 v37.62,104.14 | DDS.9 43.19,98.1 43.02,98.27 v41.59,98.27
  Top 0.406: U$1.VOUT-@2 U$1.VOUT-@1 U$1.VOUT-@4 | U$1.VOUT-@2 U$1.VOUT-@3 U$1.VOUT-@6 | U$1.VOUT-@6 U$1.VOUT-@9 U$1.VOUT-@8 U$1.VOUT-@7 U$1.VOUT-@4 | U$1.VOUT-@4 U$1.VOUT-@5 | U$1.VOUT-@6 U$1.VOUT-@5 | U$1.VOUT-@5 U$1.VOUT-@2 | U$1.VOUT-@4 v34.92,94.77 | DIGITAL_ISO1.9 32.23,74.14 32.05,74.31 C_ISO2B.2 32.05,86.5 v32.07,86.52 | DIGITAL_ISO1.9 34.29,74.14 | CLOCK.3 42.24,78.41 41.27,79.38 v40.16,79.38 | C_DDS_BYP1.2 v40.48,88.11 | v38.26,81.76 38.24,81.74 C_ISO2A.2 34.15,81.74 34.13,81.76 DIGITAL_ISO1.15 | DIGITAL_ISO1.9 v36.04,74.14
  GND 0.254: v37.62,104.14 37.62,103.82 | v41.59,98.27 41.27,98.27
  GND 0.406: v34.92,94.77 35.56,94.77 | v40.16,79.38 39.85,79.38 | v40.48,88.11 40.48,87.63 | v38.26,81.76 38.42,81.76 | v32.07,86.52 32.07,87 | v36.04,74.14 36.51,74.14
  pour GND: 29.53,92.39 29.53,72.23 46.67,72.23 46.67,92.39
  pour GND: 29.53,93.03 38.89,93.03 38.89,91.6 46.67,91.28 46.67,105.41 29.69,105.57 29.69,97.16 39.05,97.16 39.05,96.52 29.53,96.52
  pour GND: 29.53,105.89 49.37,105.89 49.37,97.16 29.53,97.16
GND_CS1  (via drill 0.5, 0.6)
  Top 0.254: R_ADJ4.2 v34.92,58.26 | C_OUT3.1 34.92,56.2 v34.92,58.26 | C_OUT4.1 36.83,60.49 36.83,59.37 35.72,58.26 v34.92,58.26 | C_DDS_BYP3.2 C_DDS_BYP4.2 41.75,53.02 42.23,52.55 44.45,52.55 44.94,53.04 C_DDS2.1 44.2,54.4 DDS1.4 | R_SET1.1 40.38,41.12 41.27,41.12 41.59,41.43 42.13,41.43 CLOCK1.3 CLOCK1.2 | OPAMP1.4 37.64,67.64 | RN2.5 40.26,68.1 38.1,68.1 37.64,67.64 | 37.64,67.64 v37.62,67.63 | DDS1.9 43.19,61.59 43.02,61.75 v41.59,61.75
  Top 0.406: U$2.VOUT-@2 U$2.VOUT-@1 U$2.VOUT-@4 | U$2.VOUT-@2 U$2.VOUT-@3 U$2.VOUT-@6 | U$2.VOUT-@6 U$2.VOUT-@9 U$2.VOUT-@8 U$2.VOUT-@7 U$2.VOUT-@4 | U$2.VOUT-@4 U$2.VOUT-@5 | U$2.VOUT-@6 U$2.VOUT-@5 | U$2.VOUT-@5 U$2.VOUT-@2 | U$2.VOUT-@4 v34.92,58.26 | DIGITAL_ISO2.9 32.23,37.62 32.05,37.8 C_ISO2B1.2 32.05,49.99 v32.07,50.01 | DIGITAL_ISO2.9 34.29,37.62 | CLOCK1.3 42.24,41.9 41.27,42.86 v40.16,42.86 | C_DDS_BYP3.2 v40.48,51.59 | v38.26,45.24 38.24,45.23 C_ISO2A1.2 34.15,45.23 34.13,45.24 DIGITAL_ISO2.15 | DIGITAL_ISO2.9 v36.04,37.62
  GND 0.254: v37.62,67.63 37.62,67.31 | v41.59,61.75 41.27,61.75
  GND 0.406: v34.92,58.26 35.56,58.26 | v40.16,42.86 39.85,42.86 | v40.48,51.59 40.48,51.12 | v38.26,45.24 38.42,45.24 | v32.07,50.01 32.07,50.48 | v36.04,37.62 36.51,37.62
  pour GND: 29.53,55.88 29.53,35.72 46.67,35.72 46.67,55.88
  pour GND: 29.53,56.52 38.89,56.52 38.89,55.09 46.67,54.77 46.67,68.9 29.69,69.06 29.69,60.64 39.05,60.64 39.05,60.01 29.53,60.01
  pour GND: 29.53,69.37 49.37,69.37 49.37,60.64 29.53,60.64
GND_CS2  (via drill 0.5, 0.6)
  Top 0.254: R_ADJ6.2 v34.92,23.34 | C_OUT5.1 34.92,21.27 v34.92,23.34 | C_OUT6.1 36.83,25.56 36.83,24.45 35.72,23.34 v34.92,23.34 | C_DDS_BYP5.2 C_DDS_BYP6.2 41.75,18.1 42.23,17.62 44.45,17.62 44.94,18.11 C_DDS6.1 44.2,19.47 DDS2.4 | R_SET2.1 40.38,6.19 41.27,6.19 41.59,6.51 42.13,6.51 CLOCK2.3 CLOCK2.2 | OPAMP2.4 37.64,32.72 | RN3.5 40.26,33.18 38.1,33.18 37.64,32.72 | 37.64,32.72 v37.62,32.7 | DDS2.9 43.19,26.66 43.02,26.83 v41.59,26.83
  Top 0.406: U$3.VOUT-@2 U$3.VOUT-@1 U$3.VOUT-@4 | U$3.VOUT-@2 U$3.VOUT-@3 U$3.VOUT-@6 | U$3.VOUT-@6 U$3.VOUT-@9 U$3.VOUT-@8 U$3.VOUT-@7 U$3.VOUT-@4 | U$3.VOUT-@4 U$3.VOUT-@5 | U$3.VOUT-@6 U$3.VOUT-@5 | U$3.VOUT-@5 U$3.VOUT-@2 | U$3.VOUT-@4 v34.92,23.34 | DIGITAL_ISO3.9 32.23,2.7 32.05,2.87 C_ISO2B2.2 32.05,15.07 v32.07,15.08 | DIGITAL_ISO3.9 34.29,2.7 | CLOCK2.3 42.24,6.97 41.27,7.94 v40.16,7.94 | C_DDS_BYP5.2 v40.48,16.67 | v38.26,10.32 38.24,10.3 C_ISO2A2.2 34.15,10.3 34.13,10.32 DIGITAL_ISO3.15 | DIGITAL_ISO3.9 v36.04,2.7
  GND 0.254: v37.62,32.7 37.62,32.38 | v41.59,26.83 41.27,26.83
  GND 0.406: v34.92,23.34 35.56,23.34 | v40.16,7.94 39.85,7.94 | v40.48,16.67 40.48,16.19 | v38.26,10.32 38.42,10.32 | v32.07,15.08 32.07,15.56 | v36.04,2.7 36.51,2.7
  pour GND: 29.53,20.95 29.53,0.79 46.67,0.79 46.67,20.95
  pour GND: 29.53,21.59 38.89,21.59 38.89,20.16 46.67,19.84 46.67,33.97 29.69,34.13 29.69,25.72 39.05,25.72 39.05,25.08 29.53,25.08
  pour GND: 29.53,34.45 49.37,34.45 49.37,25.72 29.53,25.72
IOUT
  Top 0.254: OPAMP.3 36.5,103.52 36.99,103.03 38.73,103.03 39.69,103.98 41.12,103.98 43.02,102.08 45.39,102.08 RN1.2 RN1.1 47.27,100.72 I_OUT.1
IOUT1
  Top 0.254: OPAMP1.3 36.5,67 36.99,66.52 38.73,66.52 39.69,67.47 41.12,67.47 43.02,65.56 45.39,65.56 RN2.2 RN2.1 47.27,64.2 I_OUT1.1
IOUT2
  Top 0.254: OPAMP2.3 36.5,32.08 36.99,31.59 38.73,31.59 39.69,32.54 41.12,32.54 43.02,30.64 45.39,30.64 RN3.2 RN3.1 47.27,29.28 I_OUT2.1
N$1
  Top 0.254: DDS.3 43.7,90.22 C_DDS4.2
N$2
  Top 0.254: U$1.BYP 32.07,97.95 34.45,97.95 34.67,98.17 C_BYP.1
N$3
  Top 0.254: RN1.3 RN1.4 44.67,105.41 34.45,105.41 34.29,105.25 34.29,103.19 34.62,102.86 OPAMP.2
N$4
  Top 0.254: 43.18,75.41 43.18,74.45 42.86,74.14 39.21,74.14 38.89,74.45 38.89,76.52 39.21,76.83 42.86,76.83 43.18,76.52 43.18,75.88
N$5
  VDD 0.406: 24.13,74.14 22.7,74.14 22.7,73.98 23.97,73.98
N$6
  Top 0.254: U$2.BIAS C_BIAS1.1
N$7
  Top 0.254: RN1.6 RN1.7 40.18,101.92 37.78,101.92 37.48,102.22 OPAMP.1
N$8
  Top 0.254: CLOCK.4 42.19,75.56 41.59,75.56 41.27,75.88 40.42,75.88 R_SET.2
N$9
  Top 0.254: 25.14,54.39 U$2.ADJ1 24.83,54.2 R_ADJ3.2
N$10
  Top 0.254: U$1.BIAS C_BIAS.1
N$11
  Top 0.254: 25.14,90.9 U$1.ADJ1 24.83,90.71 R_ADJ1.2
N$12
  Top 0.254: U$2.ADJ2 32.77,60.74 R_ADJ4.1
N$13
  Top 0.254: U$1.ADJ2 32.77,97.25 R_ADJ2.1
N$14
  Top 0.254: U$2.BYP 32.07,61.44 34.45,61.44 34.67,61.66 C_BYP1.1
N$15
  Top 0.254: DDS1.3 43.7,53.71 C_DDS2.2
N$16
  Top 0.254: RN2.3 RN2.4 44.67,68.9 34.45,68.9 34.29,68.74 34.29,66.67 34.62,66.34 OPAMP1.2
N$17
  Top 0.254: RN2.6 RN2.7 40.18,65.41 37.78,65.41 37.48,65.71 OPAMP1.1
N$18
  Top 0.254: CLOCK1.4 42.19,39.05 41.59,39.05 41.27,39.37 40.42,39.37 R_SET1.2
N$19
  Top 0.254: 43.18,38.89 43.18,37.94 42.86,37.62 39.21,37.62 38.89,37.94 38.89,40.01 39.21,40.32 42.86,40.32 43.18,40.01 43.18,39.37
N$20
  VDD 0.406: 24.13,37.62 22.7,37.62 22.7,37.47 23.97,37.47
N$21
  Top 0.254: U$3.BIAS C_BIAS2.1
N$22
  Top 0.254: 25.14,19.46 U$3.ADJ1 24.83,19.27 R_ADJ5.2
N$23
  Top 0.254: U$3.ADJ2 32.77,25.81 R_ADJ6.1
N$24
  Top 0.254: U$3.BYP 32.07,26.51 34.45,26.51 34.67,26.74 C_BYP2.1
N$25
  Top 0.254: DDS2.3 43.7,18.79 C_DDS6.2
N$26
  Top 0.254: RN3.3 RN3.4 44.67,33.97 34.45,33.97 34.29,33.81 34.29,31.75 34.62,31.42 OPAMP2.2
N$27
  Top 0.254: RN3.6 RN3.7 40.18,30.48 37.78,30.48 37.48,30.79 OPAMP2.1
N$28
  Top 0.254: CLOCK2.4 42.19,4.13 41.59,4.13 41.27,4.45 40.42,4.45 R_SET2.2
N$29
  Top 0.254: 43.18,3.97 43.18,3.02 42.86,2.7 39.21,2.7 38.89,3.02 38.89,5.08 39.21,5.4 42.86,5.4 43.18,5.08 43.18,4.45
N$30
  VDD 0.406: 24.13,2.7 22.7,2.7 22.7,2.54 23.97,2.54
OUT_1  (1 unrouted)
  Top 0.61: X4.1 X5.1
OUT_2  (1 unrouted)
  Top 0.61: X4.2 63.81,10.03 X5.2
OUT_3  (1 unrouted)
  Top 0.61: X4.3 X5.3
OUT_4  (1 unrouted)
  Top 0.61: X4.4 X5.4
OUT_5  (1 unrouted)
  Top 0.61: X4.5 72.09,10.03 X5.5
OUT_6  (1 unrouted)
  Top 0.61: X4.6 X5.6
OUT_7  (1 unrouted)
  Top 0.61: X4.7 X5.7
OUT_8  (1 unrouted)
  Top 0.61: X4.8 X5.8
OUT_9  (1 unrouted)
  Top 0.61: X4.9 X5.9
OUT_10  (1 unrouted)
  Top 0.61: X4.10 X5.10
OUT_11  (1 unrouted)
  Top 0.61: X5.11 X4.11
OUT_12  (1 unrouted)
  Top 0.61: X4.12 X5.12
OUT_13  (1 unrouted)
  Top 0.61: X4.13 X5.13
OUT_14  (1 unrouted)
  Top 0.61: X4.14 X5.14
OUT_15  (1 unrouted)
  Top 0.61: X4.15 99.7,10.03 X5.15
OUT_16  (1 unrouted)
  Top 0.61: X4.16 X5.16
OUT_17  (1 unrouted)
  Top 0.61: X4.17 X5.17
OUT_18  (1 unrouted)
  Top 0.61: X4.18 107.98,10.03 X5.18
OUT_19  (1 unrouted)
  Top 0.61: X4.19 X5.19
OUT_20  (2 unrouted)
  Top 0.61: X4.20 62.41,6.85 62.23,6.67
OUT_21  (1 unrouted)
  Top 0.61: X4.21 X5.21
OUT_22  (1 unrouted)
  Top 0.61: X4.22 67.95,7.49 X5.22
OUT_23  (1 unrouted)
  Top 0.61: X4.23 X5.23
OUT_24  (1 unrouted)
  Top 0.61: X4.24 X5.24
OUT_25  (1 unrouted)
  Top 0.61: X4.25 X5.25
OUT_26  (1 unrouted)
  Top 0.61: X4.26 X5.26
OUT_27  (1 unrouted)
  Top 0.61: X4.27 X5.27
OUT_28  (1 unrouted)
  Top 0.61: X4.28 X5.28
OUT_29  (1 unrouted)
  Top 0.61: X4.29 X5.29
OUT_30  (1 unrouted)
  Top 0.61: X4.30 X5.30
OUT_31  (1 unrouted)
  Top 0.61: X4.31 X5.31
OUT_32  (1 unrouted)
  Top 0.61: X4.32 95.56,7.49 X5.32
OUT_33
  Top 0.61: X4.33 X5.33
OUT_34
  Top 0.61: X4.34 X5.34
OUT_35
  Top 0.61: X4.35 103.84,7.49 X5.35
OUT_36
  Top 0.61: X4.36 X5.36
OUT_37
  Top 0.61: X4.37 X5.37
S$1
  pour GND (isolate 0.61, rank 5): -29.69,125.89 144.3,125.89 152.08,118.11 152.08,-2.06 137.79,-16.35 -26.35,-16.35 -34.61,-8.1 -34.61,120.81 -29.69,125.73
SCLK  (via drill 0.6)
  Top 0.254: DIGITAL_ISO1.12 35.24,77.95 v35.88,77.31 | DDS.7 44.2,98.81 44.45,99.06 v45.4,99.06
  Bottom 0.254: v35.88,77.31 36.35,77.31 40.01,80.96 40.01,83.82 40.8,84.61 42.7,84.61 46.04,87.95 46.04,98.42 v45.4,99.06
SCLK1  (via drill 0.6)
  Top 0.254: DIGITAL_ISO2.12 35.24,41.43 v35.88,40.8 | DDS1.7 44.2,62.3 44.45,62.55 v45.4,62.55
  Bottom 0.254: v35.88,40.8 36.35,40.8 40.01,44.45 40.01,47.31 40.8,48.1 42.7,48.1 46.04,51.44 46.04,61.91 v45.4,62.55
SCLK2  (via drill 0.6)
  Top 0.254: DIGITAL_ISO3.12 35.24,6.51 v35.88,5.87 | DDS2.7 44.2,27.38 44.45,27.62 v45.4,27.62
  Bottom 0.254: v35.88,5.87 36.35,5.87 40.01,9.53 40.01,12.38 40.8,13.18 42.7,13.18 46.04,16.51 46.04,26.99 v45.4,27.62
SCLK_IN  (via drill 0.6)
  Top 0.254: 23.81,6.51 17.3,6.51 16.19,5.4 v14.76,5.4 | 22.07,40.8 v14.76,40.8 | DIGITAL_ISO1.5 21.91,77.95 19.21,75.25 14.92,75.25 v14.76,75.41
  Top 0.406: 23.81,41.43 22.7,41.43 22.07,40.8
  Bottom 0.254: X2.2 14.01,92.82 14.76,92.08 v14.76,75.41 v14.76,40.8 v14.76,5.4
SDATA  (via drill 0.6)
  Top 0.254: DIGITAL_ISO1.13 34.92,79.22 35.56,78.58 37.15,78.58 v41.75,83.19 | v45.72,83.19 46.35,83.82 46.35,96.52 45.88,97 44.78,97 DDS.6
  Bottom 0.254: v41.75,83.19 v45.72,83.19
SDATA1  (via drill 0.6)
  Top 0.254: DIGITAL_ISO2.13 34.92,42.7 35.56,42.07 37.15,42.07 v41.75,46.67 | v45.72,46.67 46.35,47.31 46.35,60.01 45.88,60.48 44.78,60.48 DDS1.6
  Bottom 0.254: v41.75,46.67 v45.72,46.67
SDATA2  (via drill 0.6)
  Top 0.254: DIGITAL_ISO3.13 34.92,7.78 35.56,7.14 37.15,7.14 v41.75,11.75 | v45.72,11.75 46.35,12.38 46.35,25.08 45.88,25.56 44.78,25.56 DDS2.6
  Bottom 0.254: v41.75,11.75 v45.72,11.75
SDATA_IN  (via drill 0.6)
  Top 0.254: 23.81,42.7 22.54,42.7 22.23,42.39 15.88,42.39 v15.72,42.55 | 23.65,7.78 v15.72,7.78 | DIGITAL_ISO1.4 21.59,79.22 19.68,77.31 v15.72,77.31
  Bottom 0.254: X2.3 14.61,95.57 15.72,94.46 v15.72,77.31 v15.72,42.55 v15.72,7.78 15.72,7.14
SW_SCLK
  Top 0.254: 7.62,74.14 14.29,80.8 14.29,87.06 X2.1
  Top 0.406: U1.1 6.39,72.9 7.62,74.14
SW_~RESET
  Top 0.254: U1.23 12.76,71.5 13.34,72.07 13.34,77.79 16.35,80.8 16.35,93.03 12.38,97 8.79,97 X2.8
SW_~SYNC  (via drill 0.6)
  Top 0.254: U1.24 12.03,72.9 11.27,73.66 11.27,76.68 15.4,80.8 15.4,91.12 12.38,94.14 v8.79,94.14
  Bottom 0.254: v8.79,94.14 X2.7
V_SINE
  Top 0.254: DDS.10 40.55,97.09 40.01,97.63 40.01,100.44 RN1.8
V_SINE1
  Top 0.254: DDS1.10 40.55,60.58 40.01,61.12 40.01,63.92 RN2.8
V_SINE2
  Top 0.254: DDS2.10 40.55,25.65 40.01,26.19 40.01,29 RN3.8
VDD  (via drill 0.5)
  Top 0.254: C_IN.1 23.81,101.6 v23.81,100.49 | C_IN1.1 23.81,65.08 v23.81,63.98 | C_IN2.1 23.81,30.16 v23.81,29.05
  Top 0.406: U$1.VIN@2 U$1.VIN@4 U$1.VIN@3 | U$1.VIN@1 U$1.VIN@3 | U$1.VIN@2 25.08,98.74 24.92,98.58 U$1.VIN@3 | U$1.RUN U$1.VIN@2 | U$1.VIN@3 v23.81,100.49 | U$2.VIN@2 U$2.VIN@4 U$2.VIN@3 | U$2.VIN@1 U$2.VIN@3 | U$2.VIN@2 25.08,62.23 24.92,62.07 U$2.VIN@3 | U$2.RUN U$2.VIN@2 | U$2.VIN@3 v23.81,63.98 | U$3.VIN@2 U$3.VIN@4 U$3.VIN@3 | U$3.VIN@1 U$3.VIN@3 | U$3.VIN@2 25.08,27.3 24.92,27.15 U$3.VIN@3 | U$3.RUN U$3.VIN@2 | U$3.VIN@3 v23.81,29.05
  VDD 0.406: 23.5,86.52 23.5,86.84 22.86,86.84 | 23.5,50.01 23.5,50.32 22.86,50.32 | 23.5,15.08 23.5,15.4 22.86,15.4
  GND 0.406: v23.81,100.49 23.81,101.6 | v23.81,63.98 23.81,65.09 | v23.81,29.05 23.81,30.16
  pour VDD: 28.42,113.98 16.99,113.98 16.99,-2.06 28.42,-2.06
VDD_CS_ANA  (via drill 0.5, 0.6)
  Top 0.254: C_BYP.2 v34.92,100.17 35.88,100.17 C_OUT2.2
  Top 0.406: U$1.VOUT2@4 U$1.VOUT2@3 U$1.VOUT2@2 U$1.VOUT2@1 v34.92,100.17 | OPAMP.8 31.29,100.66 v31.27,100.65
  VDD 0.406: v31.27,100.65 31.27,100.17
  pour VDD: 29.53,96.84 29.53,105.89 46.2,105.89 46.2,96.84
VDD_CS_ANA1  (via drill 0.5, 0.6)
  Top 0.254: C_BYP1.2 v34.92,63.66 35.88,63.66 C_OUT4.2
  Top 0.406: U$2.VOUT2@4 U$2.VOUT2@3 U$2.VOUT2@2 U$2.VOUT2@1 v34.92,63.66 | OPAMP1.8 31.29,64.15 v31.27,64.14
  VDD 0.406: v31.27,64.14 31.27,63.66
  pour VDD: 29.53,60.33 29.53,69.37 46.2,69.37 46.2,60.33
VDD_CS_ANA2  (via drill 0.5, 0.6)
  Top 0.254: C_BYP2.2 v34.92,28.73 35.88,28.73 C_OUT6.2
  Top 0.406: U$3.VOUT2@4 U$3.VOUT2@3 U$3.VOUT2@2 U$3.VOUT2@1 v34.92,28.73 | OPAMP2.8 31.29,29.22 v31.27,29.21
  VDD 0.406: v31.27,29.21 31.27,28.73
  pour VDD: 29.53,25.4 29.53,34.45 46.2,34.45 46.2,25.4
VDD_CS_DIG  (via drill 0.5, 0.6)
  Top 0.254: C_OUT1.2 33.97,89.22 v32.7,89.22 | DDS.2 43.18,91.28 43.02,91.12 42.7,91.12 42.21,91.61 C_DDS_BYP2.1 C_DDS_BYP1.1 39.83,92.26 | C_DDS3.1 39.83,92.26 | 39.83,92.26 C_DDS_BYP1.1 39.53,91.6 v39.05,91.12
  Top 0.406: U$1.VOUT1@5 U$1.VOUT1@6 U$1.VOUT1@3 U$1.VOUT1@2 | U$1.VOUT1@4 U$1.VOUT1@5 | U$1.VOUT1@2 U$1.VOUT1@1 U$1.VOUT1@4 | U$1.VOUT1@5 U$1.VOUT1@2 | U$1.VOUT1@4 v32.7,89.22 | CLOCK.6 44.12,75.26 v44.93,74.45 | v36.04,84.93 C_ISO2A.1 36.02,83.03 DIGITAL_ISO1.16 33.35,83.27 C_ISO2B.1
  VDD 0.254: v39.05,91.12 38.73,90.81
  VDD 0.406: v32.7,89.22 32.7,88.42 | v44.93,74.45 45.09,74.45 45.4,74.14 | v36.04,84.93 36.04,85.57
  pour VDD: 29.53,92.55 29.53,72.23 46.67,72.23 46.67,92.55
VDD_CS_DIG1  (via drill 0.5, 0.6)
  Top 0.254: C_OUT3.2 33.97,52.7 v32.7,52.7 | DDS1.2 43.18,56.1 43.18,54.77 43.02,54.61 42.7,54.61 42.21,55.1 C_DDS_BYP4.1 C_DDS_BYP3.1 39.83,55.75 | C_DDS1.1 39.83,55.75 | 39.83,55.75 40.48,55.09 39.53,55.09 v39.05,54.61
  Top 0.406: U$2.VOUT1@5 U$2.VOUT1@6 U$2.VOUT1@3 U$2.VOUT1@2 | U$2.VOUT1@4 U$2.VOUT1@5 | U$2.VOUT1@2 U$2.VOUT1@1 U$2.VOUT1@4 | U$2.VOUT1@5 U$2.VOUT1@2 | U$2.VOUT1@4 v32.7,52.7 | CLOCK1.6 44.12,38.75 v44.93,37.94 | v36.04,48.42 C_ISO2A1.1 36.02,46.51 DIGITAL_ISO2.16 33.35,46.75 C_ISO2B1.1
  VDD 0.254: v39.05,54.61 38.73,54.29
  VDD 0.406: v32.7,52.7 32.7,51.91 | v44.93,37.94 45.09,37.94 45.4,37.62 | v36.04,48.42 36.04,49.05
  pour VDD: 29.53,56.04 29.53,35.72 46.67,35.72 46.67,56.04
VDD_CS_DIG2  (via drill 0.5, 0.6)
  Top 0.254: C_OUT5.2 33.97,17.78 v32.7,17.78 | DDS2.2 43.18,19.84 43.02,19.68 42.7,19.68 42.21,20.18 C_DDS_BYP6.1 C_DDS_BYP5.1 39.83,20.83 | C_DDS5.1 39.83,20.83 | 39.83,20.83 40.48,20.16 39.53,20.16 v39.05,19.68
  Top 0.406: U$3.VOUT1@5 U$3.VOUT1@6 U$3.VOUT1@3 U$3.VOUT1@2 | U$3.VOUT1@4 U$3.VOUT1@5 | U$3.VOUT1@2 U$3.VOUT1@1 U$3.VOUT1@4 | U$3.VOUT1@5 U$3.VOUT1@2 | U$3.VOUT1@4 v32.7,17.78 | CLOCK2.6 44.12,3.82 v44.93,3.02 | v36.04,13.49 C_ISO2A2.1 36.02,11.59 DIGITAL_ISO3.16 33.35,11.83 C_ISO2B2.1
  VDD 0.254: v39.05,19.68 38.73,19.37
  VDD 0.406: v32.7,17.78 32.7,16.99 | v44.93,3.02 45.09,3.02 45.4,2.7 | v36.04,13.49 36.04,14.13
  pour VDD: 29.53,21.11 29.53,0.79 46.67,0.79 46.67,21.11
X
  pour VDD (isolate 0.61, rank 6): 131.6,117.79 131.6,-8.26 130.18,-9.68 -11.43,-9.68 -17.14,-3.97 -17.14,119.7 -12.38,124.46 124.46,124.46

## Text on the board
Top: Top layer
VDD: Inner1
GND: Inner2
Bottom: Bottom Layer
tStop: Top Solder Resist
bStop: Bottom Solder Resist